# EAGLE board Vinduino-GW-29-2-16 (EAGLE 7.5.0)
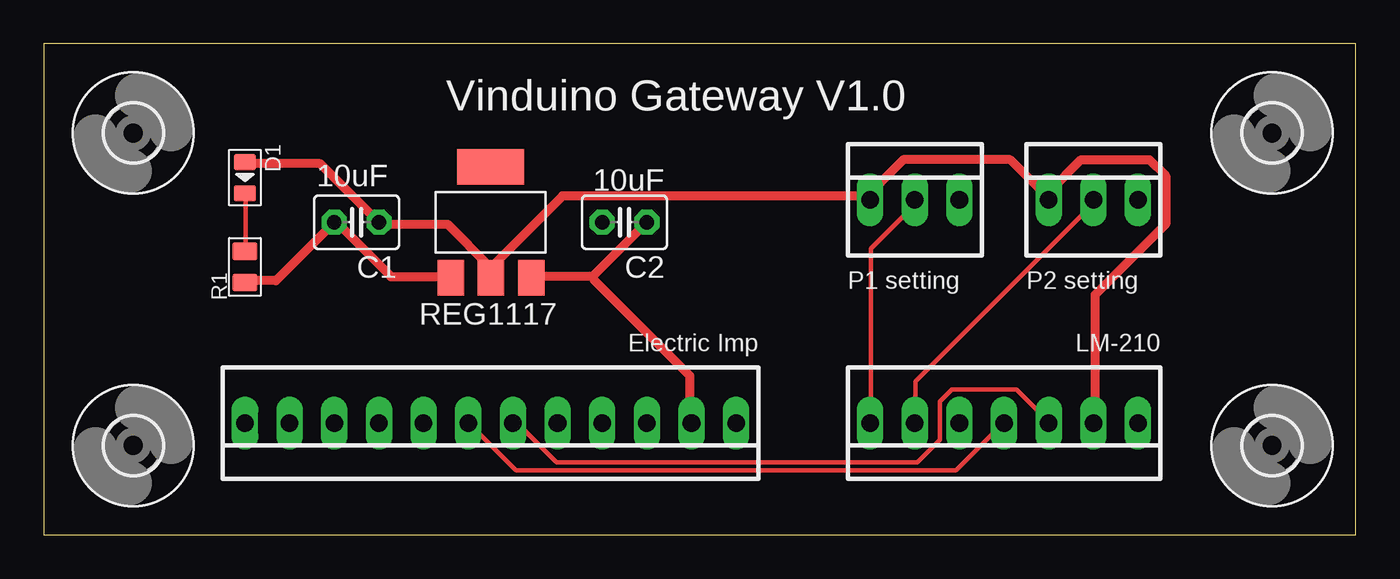
[diagram p0: board, top side]
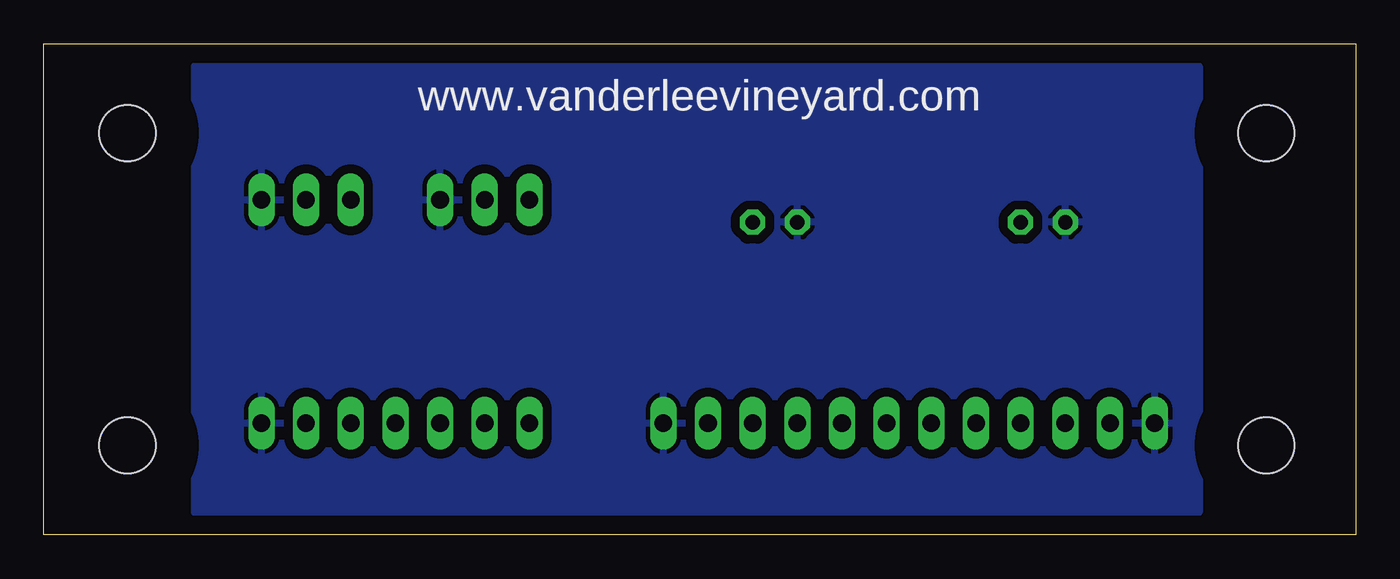
[diagram p1: board, bottom side, seen from below]

Size 74.6 x 27.93 mm. Coordinates in mm from the lower left corner, seen from the top.
Outline: 0,0 74.6,0 74.6,27.93 0,27.93 0,0
Copper layers (1*16): Top 0.0356mm / dielectric 1.5011mm / Bottom 0.0356mm
Design rules "LaenPCBOrder": minimum track width 6mil, minimum drill 13mil, track to track 6mil, track to pad 6mil, pad to pad 6mil, via to via 6mil, smd to smd 6mil, copper to edge 15mil, drill to drill 6mil, minimum pad ring 7mil, minimum via ring 7mil, stop-mask expansion 3mil, vias tented up to drill 0mil, thermal gap 10mil
Net classes: 0 default: width 0.254 mm, clearance 0.205 mm; 1 Supply: width 0.508 mm, clearance 0.508 mm

## Footprints (pad centres in the part's own frame; a part is rotated, then mirrored left to right if it is on the bottom)
C025-030X050 = drill 0.813 pad 1.422 octagon: 1 -1.27,0; 2 1.27,0
LED-0805 = smd 0.889 x 1.27: + -0.889,0; - 0.889,0
SOT223 = smd 1.499 x 2.007: 1 -2.261,-3.15; 2 0.025,-3.15; 3 2.311,-3.15 | smd 3.81 x 2.007: 4 0,3.15
22-23-2121 = drill 1 long: 1 -13.97,0; 2 -11.43,0; 3 -8.89,0; 4 -6.35,0; 5 -3.81,0; 6 -1.27,0; 7 1.27,0; 8 3.81,0; 9 6.35,0; 10 8.89,0; 11 11.43,0; 12 13.97,0
22-23-2071 = drill 1 long: 1 -7.62,0; 2 -5.08,0; 3 -2.54,0; 4 0,0; 5 2.54,0; 6 5.08,0; 7 7.62,0
R0805 = smd 1.397 x 1.016: 1 0,0.889; 2 0,-0.889
3,2 = hole 3.2: 0,0
22-23-2031 = drill 1 long: 1 -2.54,0; 2 0,0; 3 2.54,0

## Placement (x,y rotation side)
C1  10uF  [C025-030X050]  17.78,17.78 180 top
C2  10uF  [C025-030X050]  33.02,17.78 180 top
D1  GREEN-0805  [LED-0805]  11.43,20.32 270 top
IC1  REG1117  [SOT223]  25.4,17.78 0 top
IMP  Electric Imp  [22-23-2121]  25.4,6.35 180 top
LM-210  LM-210  [22-23-2071]  54.61,6.35 180 top
R1  470R  [R0805]  11.43,15.24 180 top
U$1  [3,2]  5.08,22.86 0 top
U$2  [3,2]  69.85,22.86 0 top
U$3  [3,2]  69.85,5.08 0 top
U$4  [3,2]  5.08,5.08 0 top
X1  P1 setting  [22-23-2031]  49.53,19.05 0 top
X2  P2 setting  [22-23-2031]  59.69,19.05 0 top

## Library data of the parts
C1 C2 = adafruit
D1 = Seeed-OPL-Diode; MPN: 17-215SYGC/S530-E2/TR8
IC1 = burr-brown; MPN: REG1117; OC_FARNELL: 1097566; OC_NEWARK: 14P6981
IMP = con-molex; MF: MOLEX; MPN: 22-23-2121; OC_FARNELL: 1462935; OC_NEWARK: 56H0456
LM-210 = con-molex; MF: MOLEX; MPN: 22-23-2071; OC_FARNELL: 1654534; OC_NEWARK: 56H0445
R1 = Seeed-OPL-Resistor; MPN: RC0805FR-07470RL
U$1-U$4 = holes
X1 X2 = con-molex; MF: MOLEX; MPN: 22-23-2031; OC_FARNELL: 1462950; OC_NEWARK: 30C0862

## Nets
GND [Supply]: C1.2 C2.2 IC1.1 IMP.1 IMP.12 LM-210.1 R1.1 X1.3 X2.3
N$1 [Supply]: C2.1 IC1.3 IMP.2
N$2: LM-210.6 X2.2
N$3: LM-210.7 X1.2
N$4: IMP.6 LM-210.3
N$5: IMP.7 LM-210.4
N$7: D1.- R1.2
N$26 [Supply]: C1.1 D1.+ IC1.2 LM-210.2 X1.1 X2.1

## Tracks (layer width: path | path; a pad name or v marks a point on that pad's centre or on a via)
GND
  Top 0.508: R1.1 11.47,14.46 13.2,14.46 16.41,17.67 C1.2 16.75,17.67 19.74,14.69 23.07,14.69 IC1.1
  pour Bottom: 8.89,26.67 8.89,1.27 66.04,1.27 66.04,26.67
N$1
  Top 0.508: 31.21,14.69 27.77,14.69 IC1.3 | 31.21,14.69 34.2,17.67 C2.1 | IMP.2 36.72,6.43 36.72,9.06 31.33,14.46 31.21,14.69
N$2
  Top 0.254: LM-210.6 49.57,6.43 49.57,8.72 59.67,18.82 59.67,19.05 X2.2
N$3
  Top 0.254: LM-210.7 47.05,6.43 47.05,16.29 49.46,18.7 49.46,19.05 X1.2
N$4
  Top 0.254: IMP.6 26.74,6.31 26.97,6.31 29.15,4.13 49.69,4.13 50.95,5.39 50.95,7.57 51.64,8.26 55.31,8.26 57.15,6.43 LM-210.3
N$5
  Top 0.254: IMP.7 24.21,6.31 26.85,3.67 51.87,3.67 54.51,6.31 LM-210.4
N$7
  Top 0.254: D1.- 11.47,19.39 11.47,16.18 R1.2
N$26
  Top 0.508: D1.+ 11.47,21.11 15.72,21.11 C1.1 19.28,17.67 22.95,17.67 25.36,15.26 25.36,14.69 IC1.2 25.59,15.38 29.49,19.28 46.82,19.28 X1.1 47.05,19.16 47.05,19.51 48.88,21.34 54.97,21.34 57.15,19.16 X2.1 57.15,19.51 58.98,21.34 62.88,21.34 63.8,20.43 63.8,17.67 59.78,13.65 59.78,6.43 LM-210.2

## Text on the board
tNames: Vinduino Gateway V1.0
bNames: www.vanderleevineyard.com